# EAGLE board sencerMain (EAGLE 7.4.0)
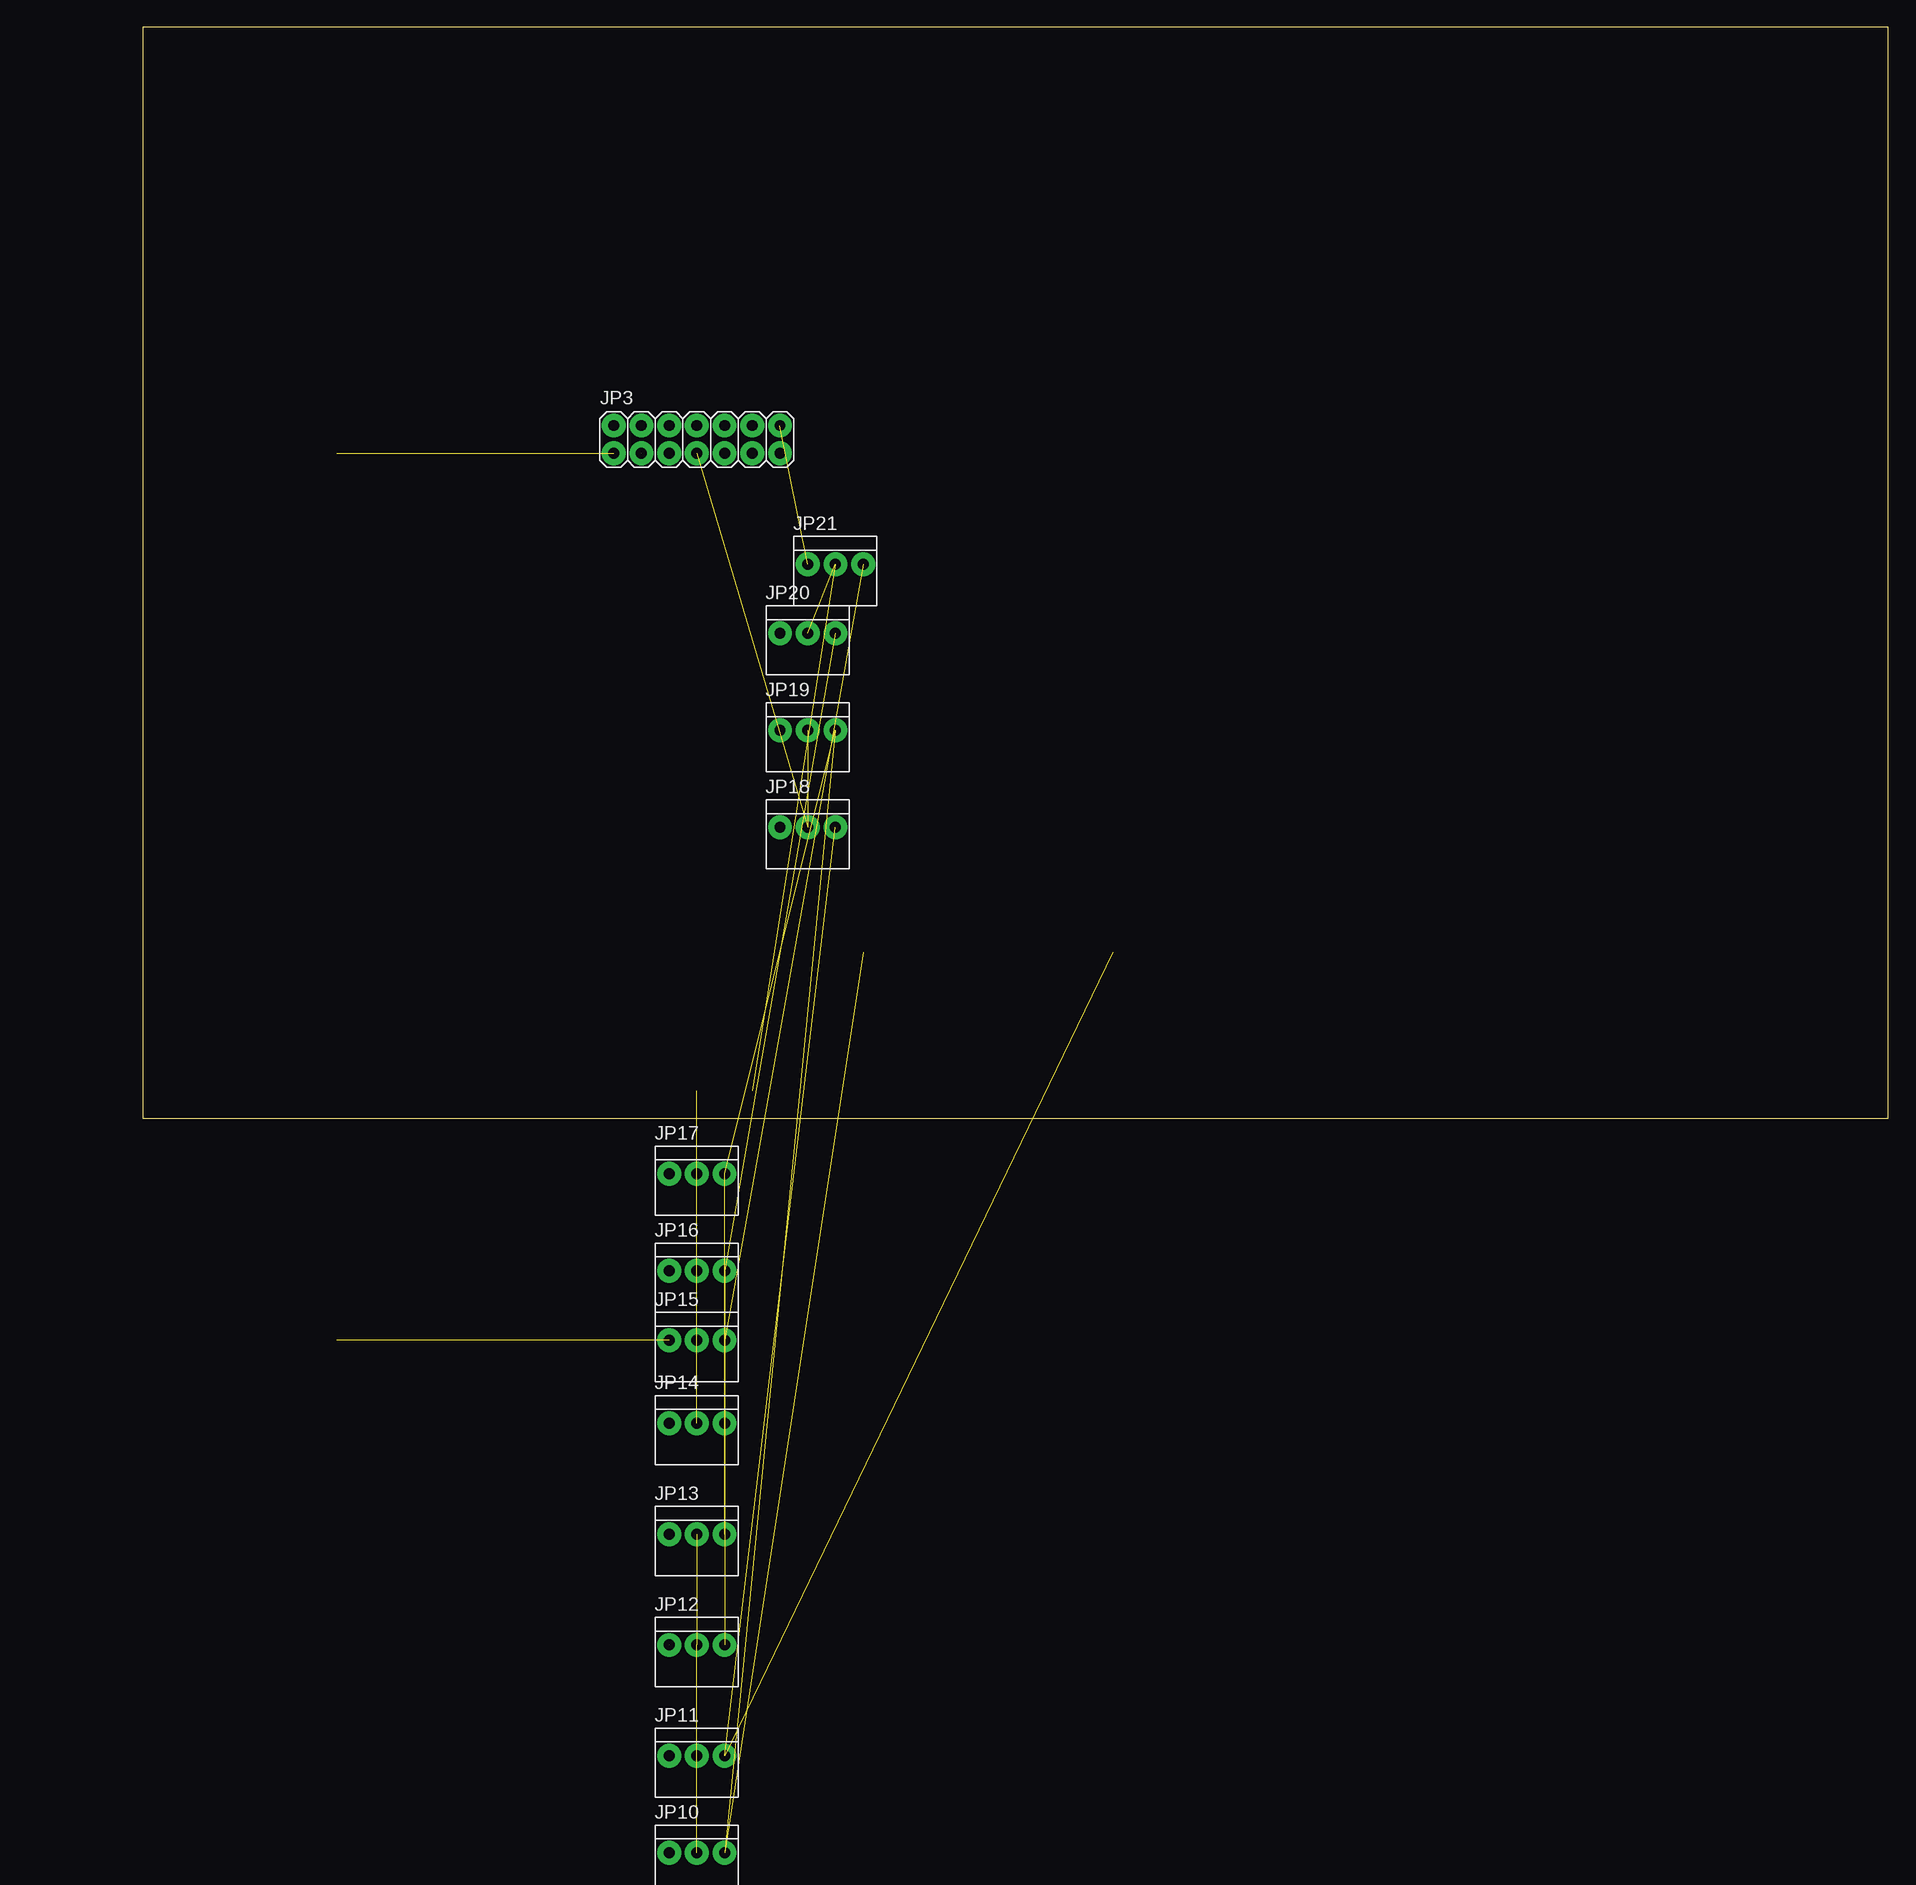
[diagram p0: board, top side]
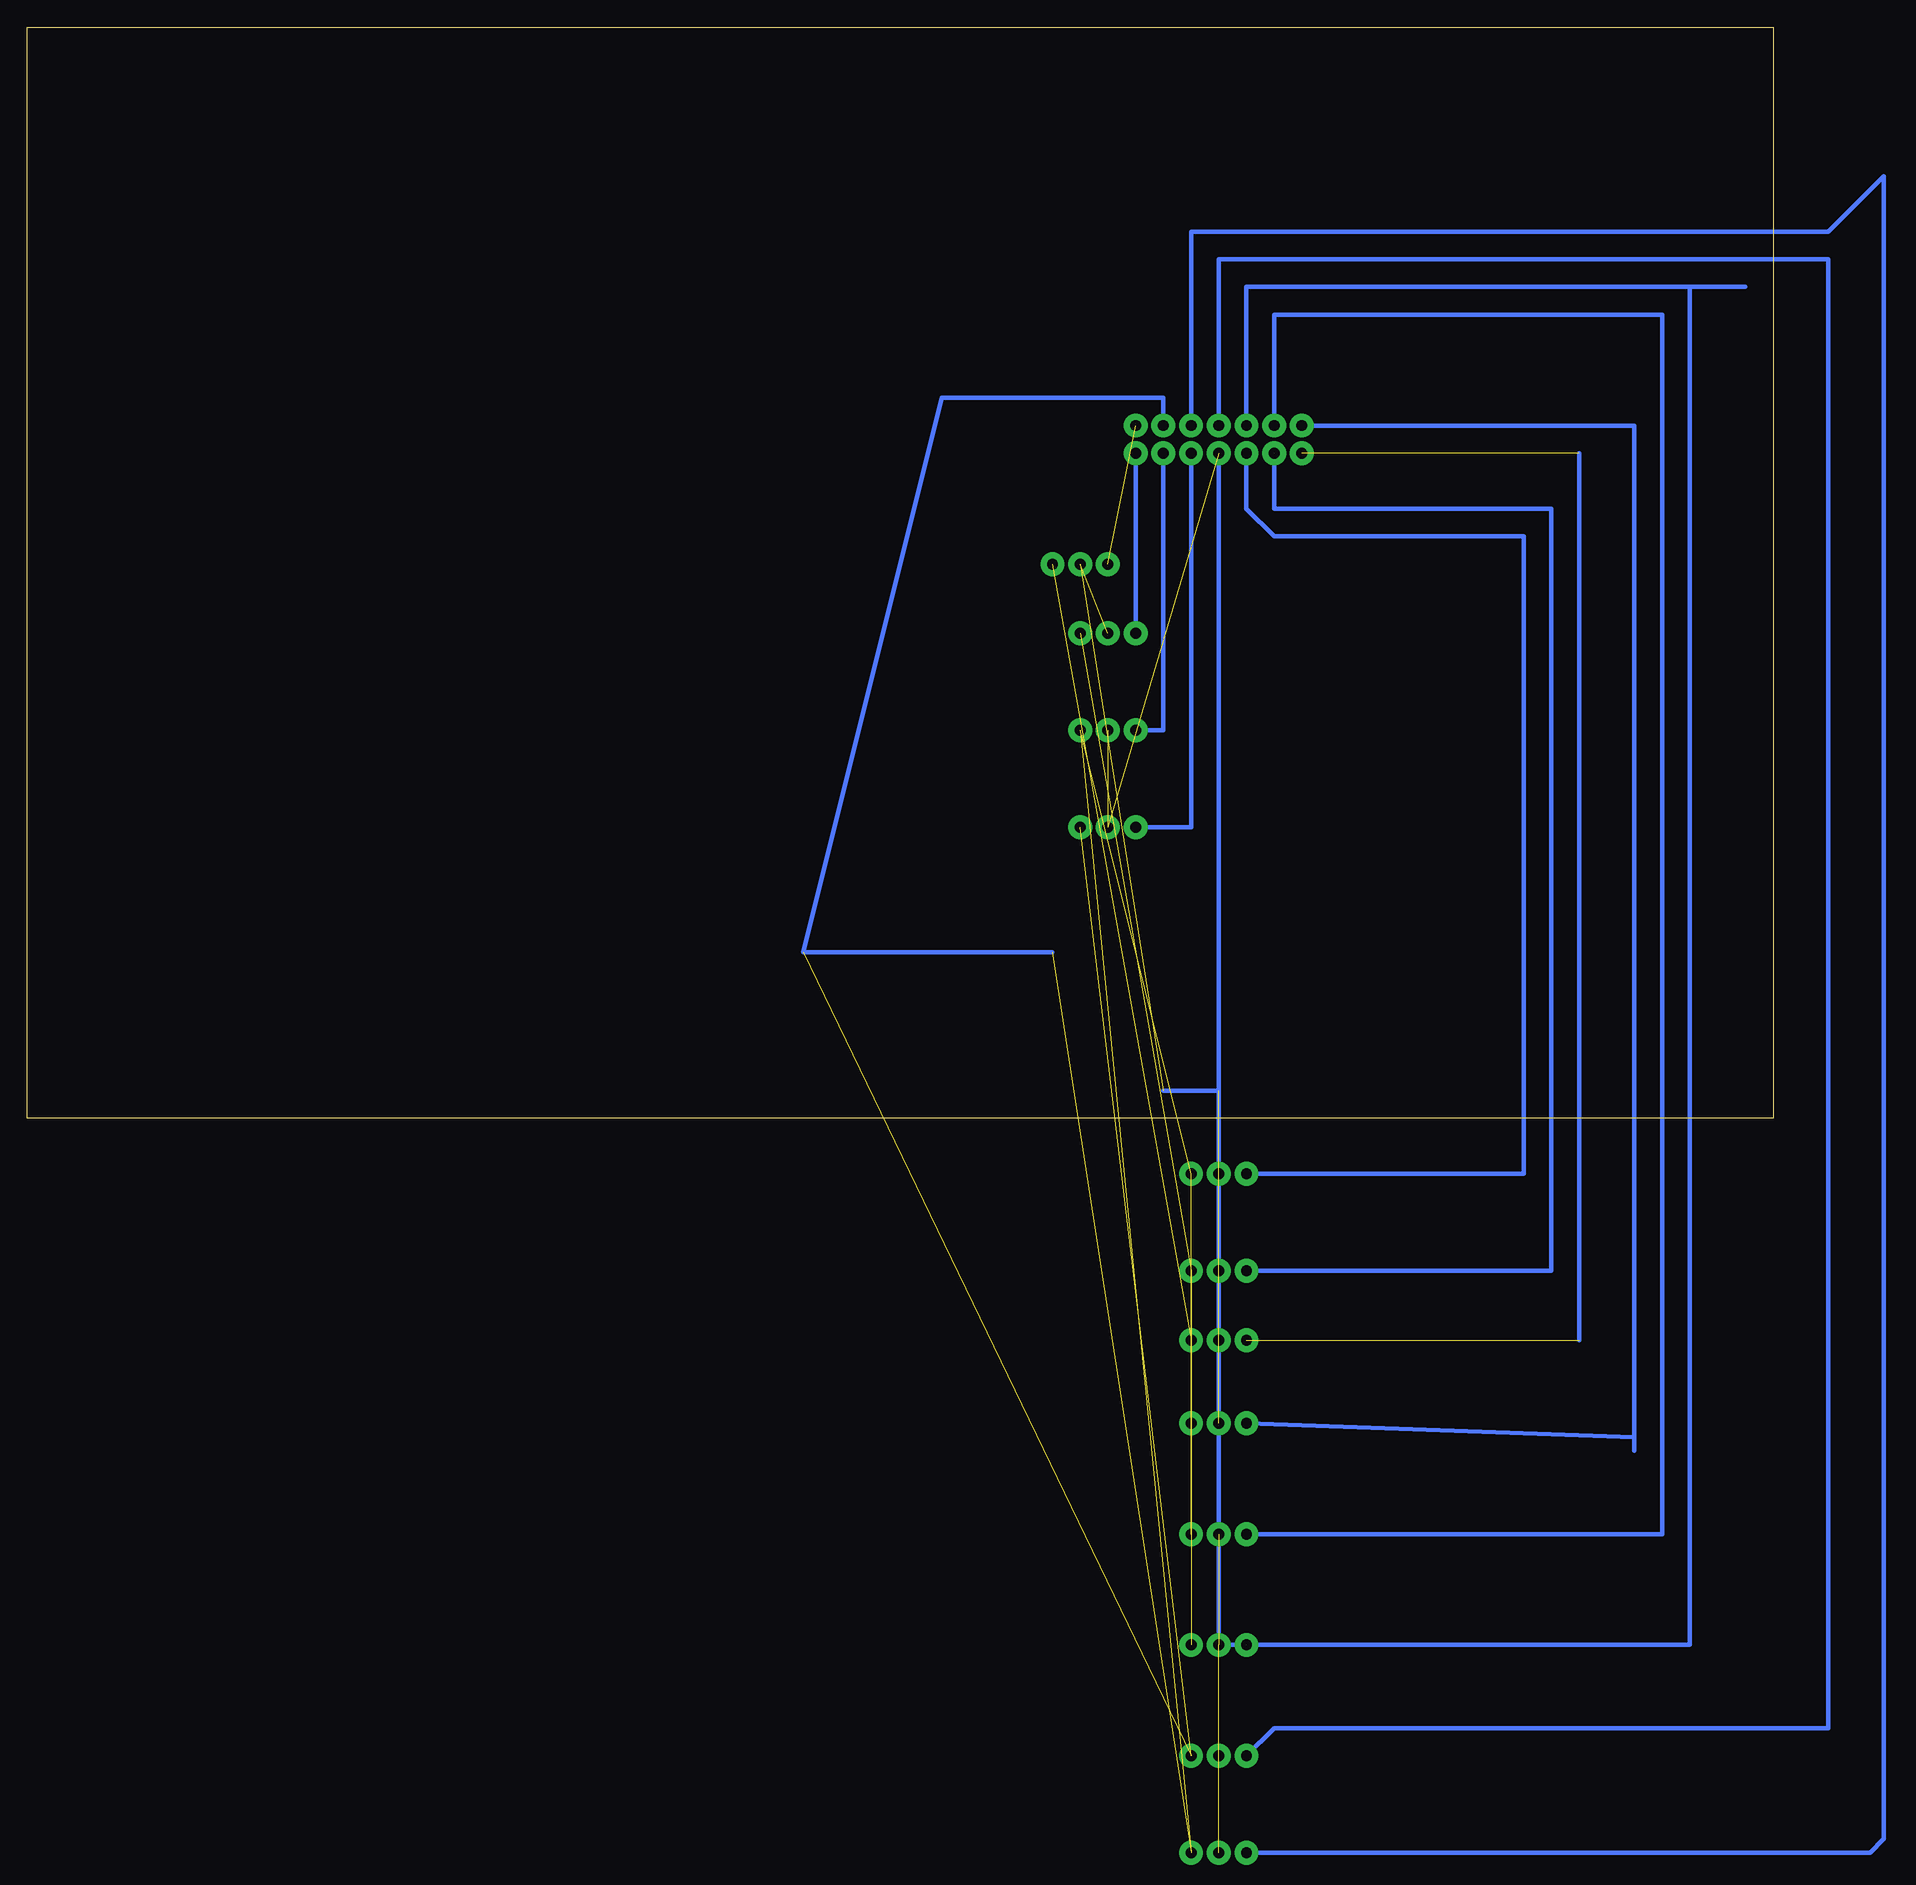
[diagram p1: board, bottom side, seen from below]

Size 160 x 100 mm. Coordinates in mm from the lower left corner, seen from the top.
Outline: 0,0 160,0 160,100 0,100 0,0
Copper layers (1*16): Top 0.035mm / dielectric 1.5mm / Bottom 0.035mm
Design rules "default": minimum track width 10mil, minimum drill 24mil, track to track 8mil, track to pad 8mil, pad to pad 8mil, via to via 8mil, smd to smd 8mil, copper to edge 40mil, drill to drill 8mil, minimum pad ring 10mil, minimum via ring 8mil, stop-mask expansion 4mil, vias tented up to drill 0mil, thermal gap 10mil

## Footprints (pad centres in the part's own frame; a part is rotated, then mirrored left to right if it is on the bottom)
2X07 = drill 1 pad 2.184: 1 -7.62,-1.27; 2 -7.62,1.27; 3 -5.08,-1.27; 4 -5.08,1.27; 5 -2.54,-1.27; 6 -2.54,1.27; 7 0,-1.27; 8 0,1.27; 9 2.54,-1.27; 10 2.54,1.27; 11 5.08,-1.27; 12 5.08,1.27; 13 7.62,-1.27; 14 7.62,1.27
1*03 = drill 1 pad 2.184: 1 -2.54,0; 2 0,0; 3 2.54,0

## Placement (x,y rotation side)
JP3  [2X07]  50.8,62.23 0 top
JP10  [1*03]  50.8,-67.31 0 top  (outside the outline)
JP11  [1*03]  50.8,-58.42 0 top  (outside the outline)
JP12  [1*03]  50.8,-48.26 0 top  (outside the outline)
JP13  [1*03]  50.8,-38.1 0 top  (outside the outline)
JP14  [1*03]  50.8,-27.94 0 top  (outside the outline)
JP15  [1*03]  50.8,-20.32 0 top  (outside the outline)
JP16  [1*03]  50.8,-13.97 0 top  (outside the outline)
JP17  [1*03]  50.8,-5.08 0 top  (outside the outline)
JP18  [1*03]  60.96,26.67 0 top
JP19  [1*03]  60.96,35.56 0 top
JP20  [1*03]  60.96,44.45 0 top
JP21  [1*03]  63.5,50.8 0 top

## Library data of the parts
JP3 JP10-JP21 = pinhead_s

## Nets
+5V: JP3.7 JP10.2 JP11.2 JP12.2 JP13.2 JP14.2 JP15.2 JP16.2 JP17.2 JP18.2 JP19.2 JP20.2 JP21.2
FOT1: JP3.10 JP10.1
FOT2: JP3.8 JP11.1
FOT3: JP3.6 JP12.1
FOT4: JP3.4 JP13.1
GND: JP3.12 JP10.3 JP11.3 JP13.3 JP14.3 JP15.3 JP17.3 JP18.3 JP19.3 JP21.3
N$25: JP12.3 JP16.3 JP20.3
RIMIT1: JP3.2 JP14.1
RIMIT2: JP3.1 JP15.1
RIMIT3: JP3.3 JP16.1
RIMIT4: JP3.5 JP17.1
RIMIT5: JP3.9 JP18.1
RIMIT6: JP3.11 JP19.1
RIMIT7: JP3.13 JP20.1
RIMIT8: JP3.14 JP21.1

## Tracks (layer width: path | path; a pad name or v marks a point on that pad's centre or on a via)
+5V  (11 unrouted)
  Bottom 0.406: JP3.7 50.8,2.54 | 50.8,2.54 JP12.2 | 55.88,2.54 50.8,2.54
FOT1
  Bottom 0.406: JP10.1 -8.89,-67.31 -10.16,-66.04 -10.16,86.36 -5.08,81.28 53.34,81.28 JP3.10
FOT2
  Bottom 0.406: JP3.8 50.8,78.74 -5.08,78.74 -5.08,-55.88 45.72,-55.88 JP11.1
FOT3  (1 unrouted)
  Bottom 0.406: JP3.6 48.26,76.2 7.62,76.2 | 2.54,76.2 7.62,76.2 | 7.62,76.2 7.62,-48.26 JP12.1 50.8,-48.26
FOT4
  Bottom 0.406: JP3.4 45.72,73.66 10.16,73.66 10.16,-38.1 JP13.1
GND  (9 unrouted)
  Bottom 0.406: JP3.12 55.88,66.04 76.2,66.04 88.9,15.24 66.04,15.24
N$25  (2 unrouted)
RIMIT1
  Bottom 0.406: JP14.1 12.7,-29.21 | 12.7,-29.21 12.7,-30.48 | 12.7,-29.21 12.7,63.5 JP3.2
RIMIT2  (2 unrouted)
  Bottom 0.406: 17.78,-20.32 17.78,60.96
RIMIT3  (1 unrouted)
  Bottom 0.406: JP16.1 20.32,-13.97 20.32,55.88 45.72,55.88 JP3.3
RIMIT4
  Bottom 0.406: JP3.5 48.26,55.88 45.72,53.34 22.86,53.34 22.86,-5.08 JP17.1
RIMIT5
  Bottom 0.406: JP18.1 53.34,26.67 JP3.9
RIMIT6
  Bottom 0.406: JP19.1 55.88,35.56 JP3.11
RIMIT7
  Bottom 0.406: JP20.1 JP3.13
RIMIT8  (1 unrouted)